# Altium PCB pcb_LAB_rev1.PcbDoc (part 2 of 2)
Units mil, origin at the board's own origin, x right, y up, seen from the top; angles counter-clockwise.
Board outline 6385 x 5855 mil, 2 copper layers (Top Layer, Bottom Layer); 127 components, 63 nets, 386 pads, 32 vias.
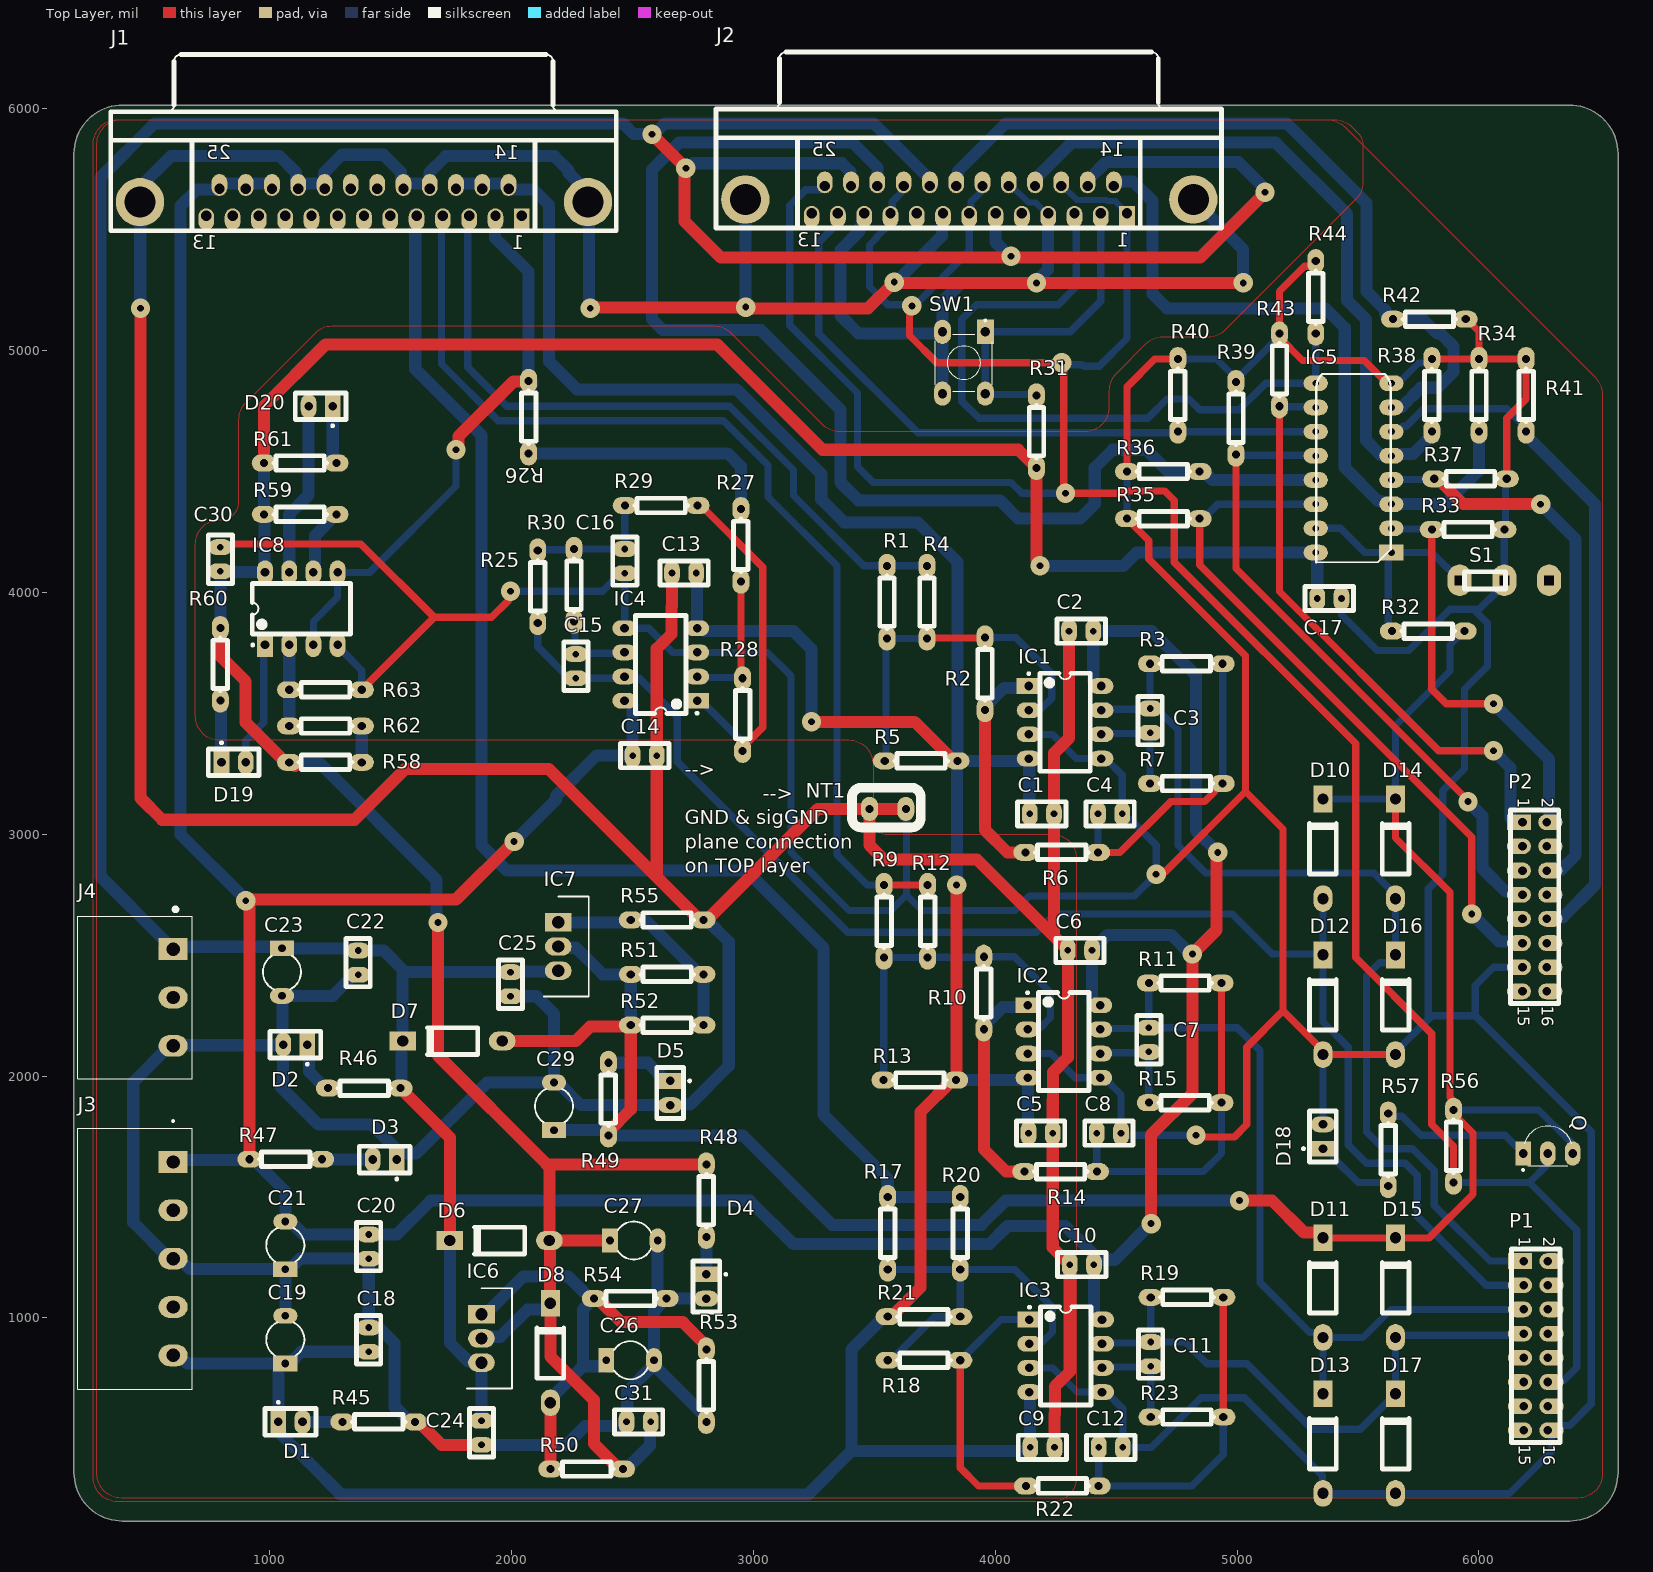
[diagram p0: Top Layer view]

## Polygon pours and split planes (outlines as drawn) (continued)
GND on Bottom Layer "GND_BOT" (solid, remove dead copper, shelved, pour order 6): 5403.58,5955 cw(c5403.58,5855) 5474.29,5925.71 5498.79,5901.21 cw(c5447.57,5850) 5520,5850 5520,5696.42 cw(c5420,5696.42) 5490.71,5625.71 4949.29,5084.29 cw(c4878.58,5155) 4878.58,5055 4691.42,5055 ccw(c4691.42,4955) 4620.71,5025.71 4499.29,4904.29 ccw(c4570,4833.58) 4470,4833.58 4470,4765 cw(c4370,4765) 4370,4665 3356.42,4665 cw(c3356.42,4765) 3285.71,4694.29 2909.29,5070.71 ccw(c2838.58,5000) 2838.58,5100 1256.42,5100 ccw(c1256.42,5000) 1185.71,5070.71 899.29,4784.29 ccw(c970,4713.58) 870,4713.58 870,4373.21 cw(c795,4373.21) 795,4298.21 790,4298.21 ccw(c790,4198.21) 690,4198.21 690,3490 ccw(c790,3490) 790,3390 3394.17,3390 cw(c3394.17,3290) 3494.17,3290 3494.17,3057.99 ccw(c3552.16,3057.99) 3552.16,3000 4235,3000 cw(c4235,2900) 4335,2900 4335,340 cw(c4235,340) 4235,240 370,240 cw(c370,340) 270,340 270,5855 cw(c370,5855) 370,5955
sigGND on Bottom Layer "sigGND_BOT" (solid, remove dead copper, shelved, pour order 7): 5373.58,5955 cw(c5373.58,5855) 5444.29,5925.71 6480.71,4889.29 cw(c6410,4818.58) 6510,4818.58 6510,355 cw(c6410,355) 6410,255 385,255 cw(c385,355) 285,355 285,5855 cw(c385,5855) 385,5955 3690,5955

## Silkscreen, mask and mechanical layers (free items; w line width, h text height)
Top Overlay:
  lines w40: 3407.08,3067.95 ccw(c3447.08,3067.95) 3447.08,3027.95 3652.08,3027.95 ccw(c3652.08,3067.95) 3692.08,3067.95 3692.08,3152.95 ccw(c3652.08,3152.95) 3652.08,3192.95 3447.08,3192.95 ccw(c3447.08,3152.95) 3407.08,3152.95 3407.08,3067.95
  text "--> /              --> / GND & sigGND / plane connection / on TOP layer" at 2715,2820 h100
Mechanical 13:
  lines w10: 190,360 ccw(c390,360) 390,160 6375,160 ccw(c6375,360) 6575,360 6575,5815 ccw(c6375,5815) 6375,6015 390,6015 ccw(c390,5815) 190,5815 190,360 ; 300,6450 300,6450 ; 6450,6451.57 6450,6451.57

## Text inside footprints (layer, text, board x,y; h text height)
J1: Top Overlay "1" at 2051.4,5418.23 h59.06; Top Overlay "13" at 781.44,5418.23 h59.06; Top Overlay "14" at 2031.5,5792.24 h59.06; Top Overlay "25" at 840.71,5792.24 h59.06
J2: Top Overlay "1" at 4554.55,5428.84 h59.06; Top Overlay "13" at 3284.59,5428.84 h59.06; Top Overlay "14" at 4534.65,5802.85 h59.06; Top Overlay "25" at 3343.86,5802.85 h59.06
P1: Top Overlay "2" at 6265,1335 h50 r270; Top Overlay "1" at 6165,1335 h50 r270; Top Overlay "15" at 6165,475 h50 r270; Top Overlay "16" at 6265,475 h50 r270
P2: Top Overlay "2" at 6260,3150 h50 r270; Top Overlay "1" at 6160,3150 h50 r270; Top Overlay "15" at 6160,2290 h50 r270; Top Overlay "16" at 6260,2290 h50 r270